# EAGLE board v2 (EAGLE 9.6.2)
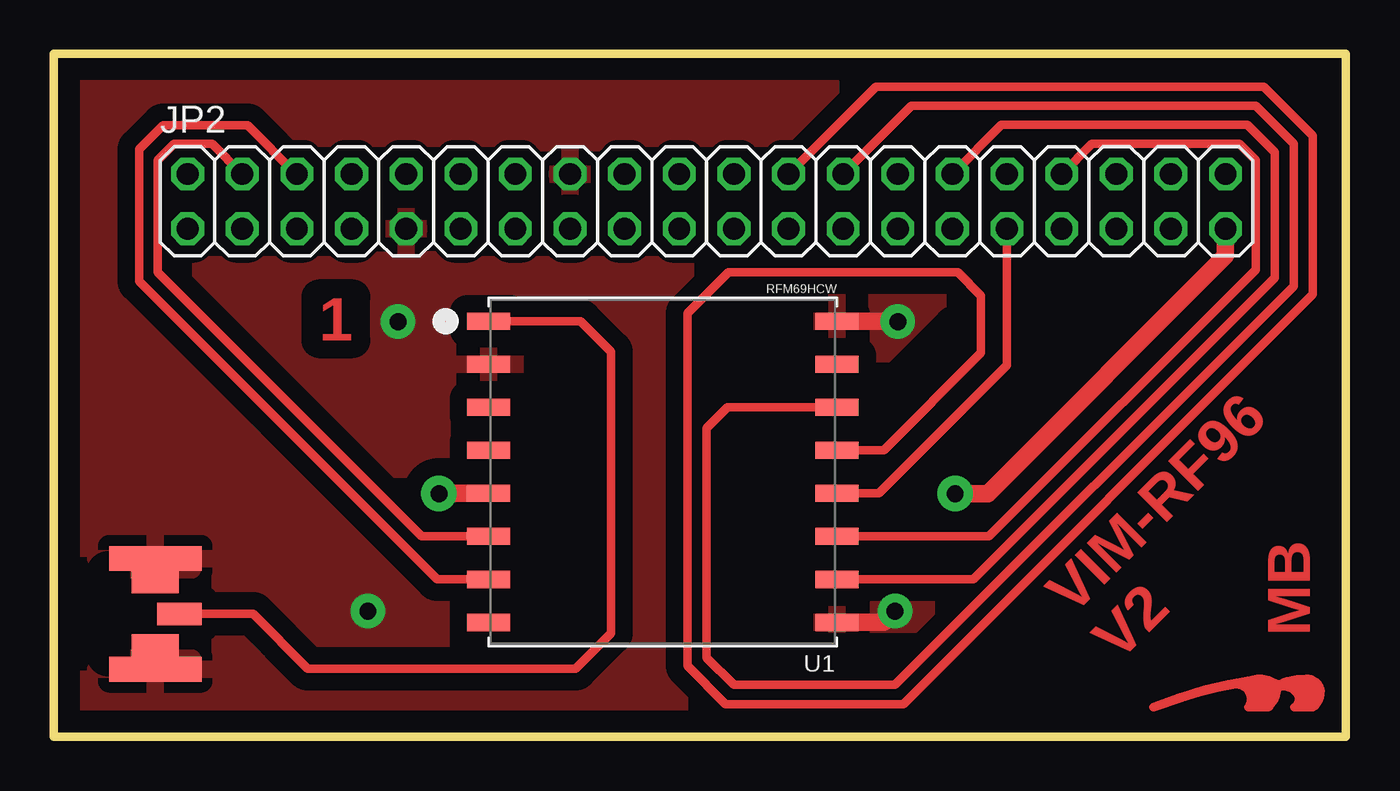
[diagram p0: board, top side]
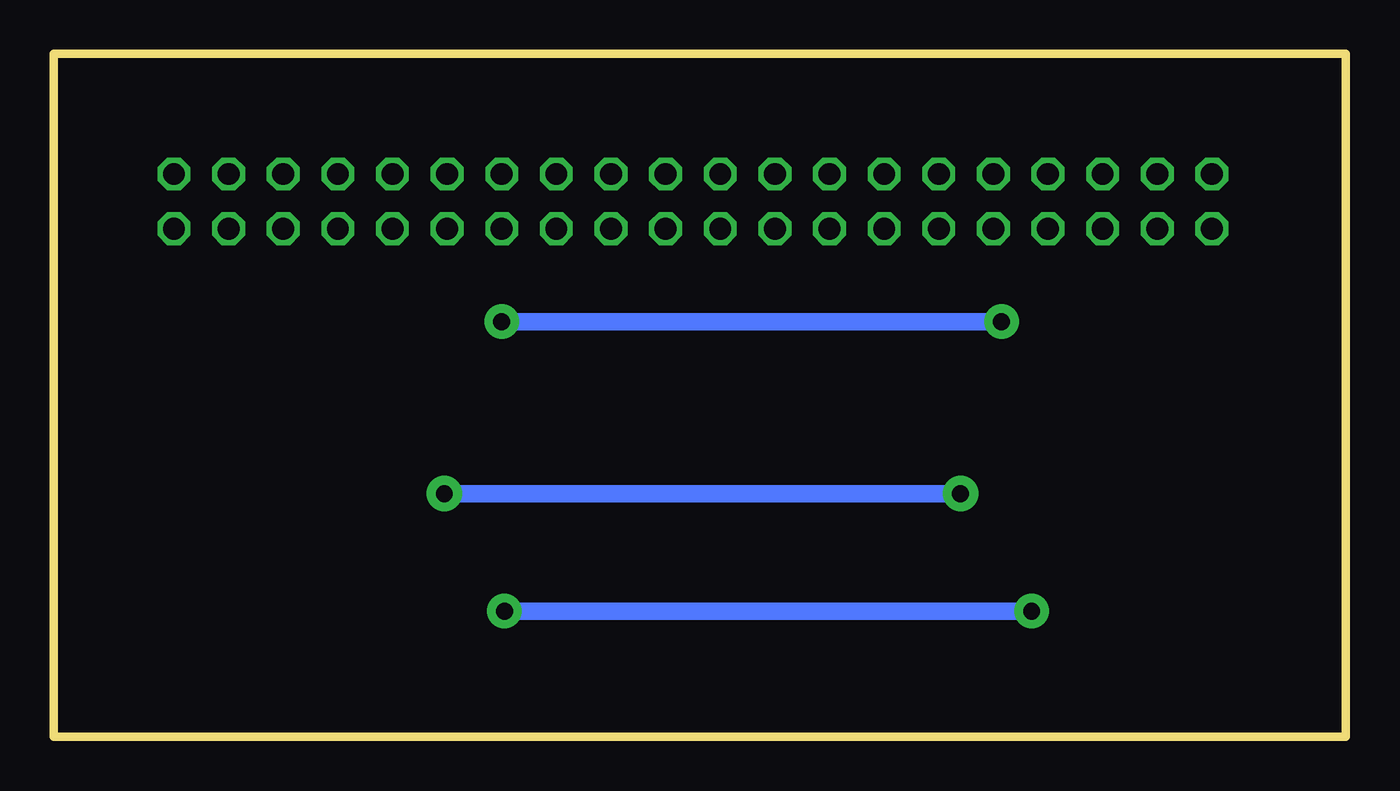
[diagram p1: board, bottom side, seen from below]

Size 60.07 x 31.75 mm. Coordinates in mm from the lower left corner, seen from the top.
Outline: 0,0 60.07,0 60.07,31.75 0,31.75 0,0
Copper layers (1*16): Top 0.035mm / dielectric 1.5mm / Bottom 0.035mm
Design rules "htl-klu": minimum track width 16mil, minimum drill 31mil, track to track 16mil, track to pad 16mil, pad to pad 16mil, via to via 16mil, smd to smd 12mil, copper to edge 40mil, drill to drill 16mil, minimum pad ring 10mil, minimum via ring 16mil, stop-mask expansion 4mil, vias tented up to drill 0mil, thermal gap 20mil
tRestrict: 6 lines

## Footprints (pad centres in the part's own frame; a part is rotated, then mirrored left to right if it is on the bottom)
ANTENNA_CONNECTOR_UFL_SMA = smd 2.2 x 2.2: GND -2.05,1.125; GND@2 2.05,1.125 | smd 1.15 x 4.3: GND@1 -2.575,1.125; GND@3 2.575,1.125 | smd 1.05 x 2.05: SIGNAL 0,0
2X20 = drill 1.016 octagon: 1 -24.13,-1.27; 2 -24.13,1.27; 3 -21.59,-1.27; 4 -21.59,1.27; 5 -19.05,-1.27; 6 -19.05,1.27; 7 -16.51,-1.27; 8 -16.51,1.27; 9 -13.97,-1.27; 10 -13.97,1.27; 11 -11.43,-1.27; 12 -11.43,1.27; 13 -8.89,-1.27; 14 -8.89,1.27; 15 -6.35,-1.27; 16 -6.35,1.27; 17 -3.81,-1.27; 18 -3.81,1.27; 19 -1.27,-1.27; 20 -1.27,1.27; 21 1.27,-1.27; 22 1.27,1.27; 23 3.81,-1.27; 24 3.81,1.27; 25 6.35,-1.27; 26 6.35,1.27; 27 8.89,-1.27; 28 8.89,1.27; 29 11.43,-1.27; 30 11.43,1.27; 31 13.97,-1.27; 32 13.97,1.27; 33 16.51,-1.27; 34 16.51,1.27; 35 19.05,-1.27; 36 19.05,1.27; 37 21.59,-1.27; 38 21.59,1.27; 39 24.13,-1.27; 40 24.13,1.27
RFMHCW_SMT = smd 2 x 0.8: 1P 8.1,-7; 2P 8.1,-5; 3P 8.1,-3; 4P 8.1,-1; 5P 8.1,1; 6P 8.1,3; 7P 8.1,5; 8P 8.1,7; 9P -8.1,7; 10P -8.1,5; 11P -8.1,3; 12P -8.1,1; 13P -8.1,-1; 14P -8.1,-3; 15P -8.1,-5; 16P -8.1,-7

## Placement (x,y rotation side)
CN1  ANTENNA_CONNECTOR_UFL_SMA  [ANTENNA_CONNECTOR_UFL_SMA]  5.84,5.71 90 top
JP2  [2X20]  30.35,24.89 0 top
U1  RFM69HCW  [RFMHCW_SMT]  28.32,12.32 180 top
U$1  [LOGOTOP_8]  56.39,1.4 0 top

## Library data of the parts
CN1 = antenna_connector_ufl_sma
JP2 = pinhead
U1 = microbuilder
U$1 = HTL-Logo

## Nets
+3V3: JP2.39 U1.5P
DIO0-TXRXDONE: JP2.6 U1.7P
DIO1-RXTIMEOUT: JP2.4 U1.6P
GND: CN1.GND CN1.GND@1 CN1.GND@2 CN1.GND@3 JP2.9 JP2.16 U1.2P U1.9P U1.16P
MISO: JP2.30 U1.10P
MOSI: JP2.34 U1.11P
N$1: CN1.SIGNAL U1.1P
RESET: JP2.26 U1.14P
RF_SS: JP2.24 U1.13P
SCLK: JP2.31 U1.12P

## Tracks (layer width: path | path; a pad name or v marks a point on that pad's centre or on a via)
+3V3  (via drill 0.79 pad 1.65)
  Top 0.406: 17.92,11.32 v17.91,11.3
  Top 0.813: U1.5P 17.92,11.32 | v41.91,11.3 43.43,11.3 54.48,22.35 JP2.39
  Bottom 0.813: v17.91,11.3 v41.91,11.3
DIO0-TXRXDONE
  Top 0.406: JP2.6 11.28,26.16 9.02,28.42 5.08,28.42 3.96,27.3 3.96,21.18 17.83,7.32 U1.7P
DIO1-RXTIMEOUT
  Top 0.406: JP2.4 7.37,27.56 5.59,27.56 4.83,26.8 4.83,21.59 17.1,9.32 U1.6P
GND  (via drill 0.79)
  Top 0.406: 39.23,19.32 v39.24,19.3
  Top 0.813: U1.16P 39.23,19.32 | U1.9P 38.59,5.32 v39.12,5.84
  Bottom 0.813: v39.24,19.3 v16,19.3 | v39.12,5.84 v14.61,5.84
  pour Top (isolate 0.813): -1.4,-1.27 -1.4,33.02 61.47,33.02 61.47,-1.27
MISO
  Top 0.406: JP2.30 44.07,28.45 55.5,28.45 56.77,27.18 56.77,21.34 42.75,7.32 U1.10P
MOSI
  Top 0.406: JP2.34 48.26,27.56 55.12,27.56 55.88,26.8 55.88,21.72 43.48,9.32 U1.11P
N$1
  Top 0.406: U1.1P 24.5,19.32 25.91,17.91 25.91,4.83 24.26,3.17 11.81,3.17 9.27,5.71 CN1.SIGNAL
RESET
  Top 0.406: JP2.26 39.88,29.34 55.88,29.34 57.66,27.56 57.66,20.95 39.12,2.41 31.62,2.41 30.35,3.68 30.35,14.35 31.32,15.32 U1.14P
RF_SS
  Top 0.406: U1.13P 38.59,13.32 43.12,17.84 43.12,20.51 42.04,21.59 31.37,21.59 29.46,19.68 29.46,3.3 31.24,1.52 39.5,1.52 58.55,20.57 58.55,27.94 56.26,30.23 38.23,30.23 JP2.24
SCLK
  Top 0.406: JP2.31 44.32,17.27 38.37,11.32 U1.12P

## Text on the board
Top: 1 | MB | VIM-RF96 / V2